# Altium PCB Burn Wire Dev Board.PcbDoc
Units mil, origin at the board's own origin, x right, y up, seen from the top; angles counter-clockwise.
Board outline 3031.5 x 787.4 mil, 2 copper layers (Top Layer, Bottom Layer), stack 52.559 mil thick; 26 components, 9 nets, 61 pads, 69 vias.
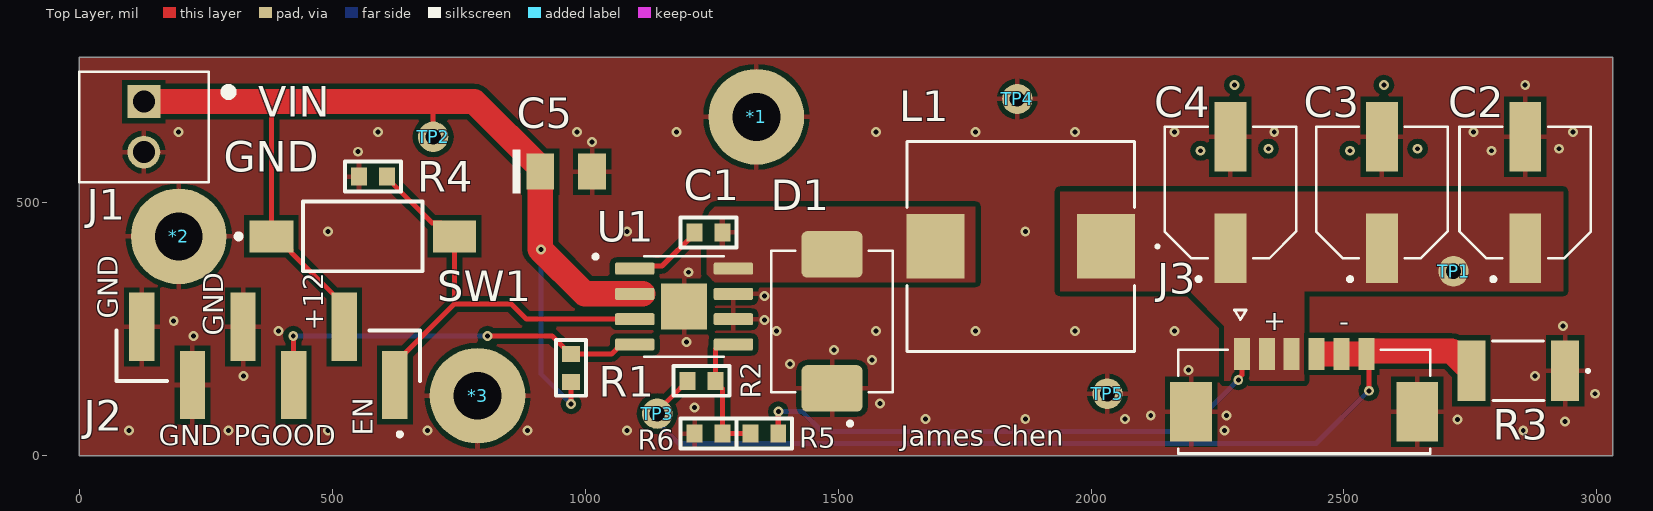
[diagram p0: Top Layer view]
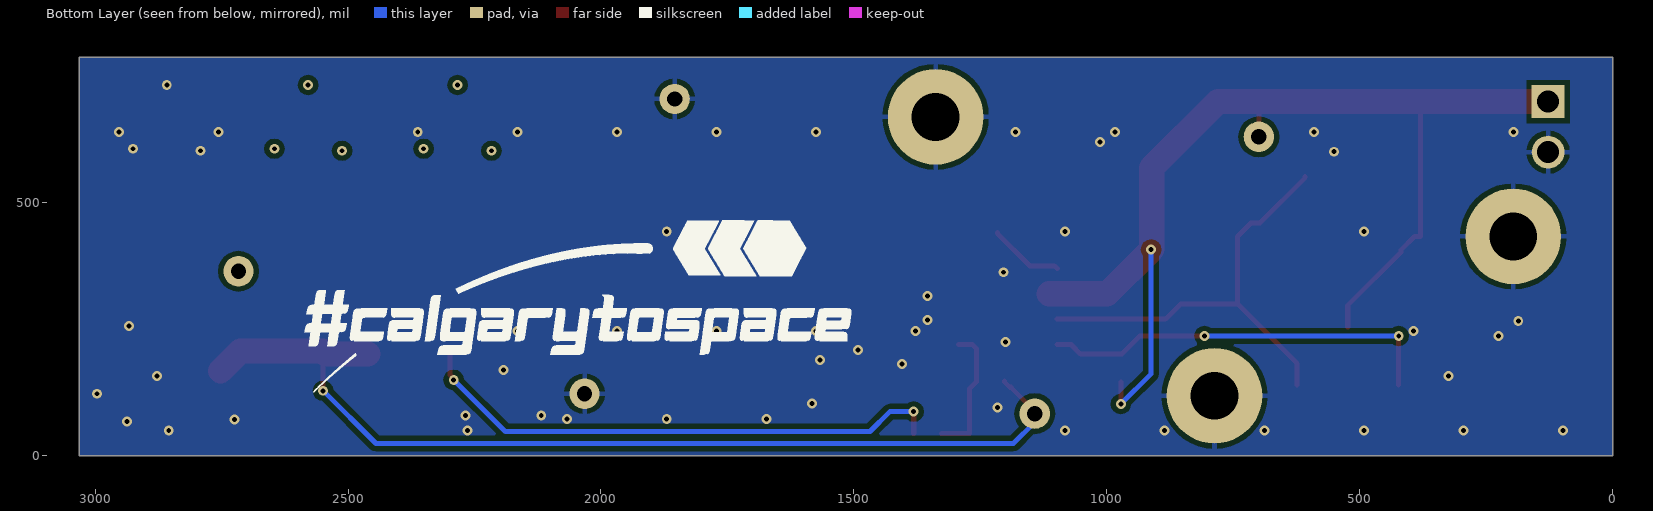
[diagram p1: Bottom Layer view, seen from below]
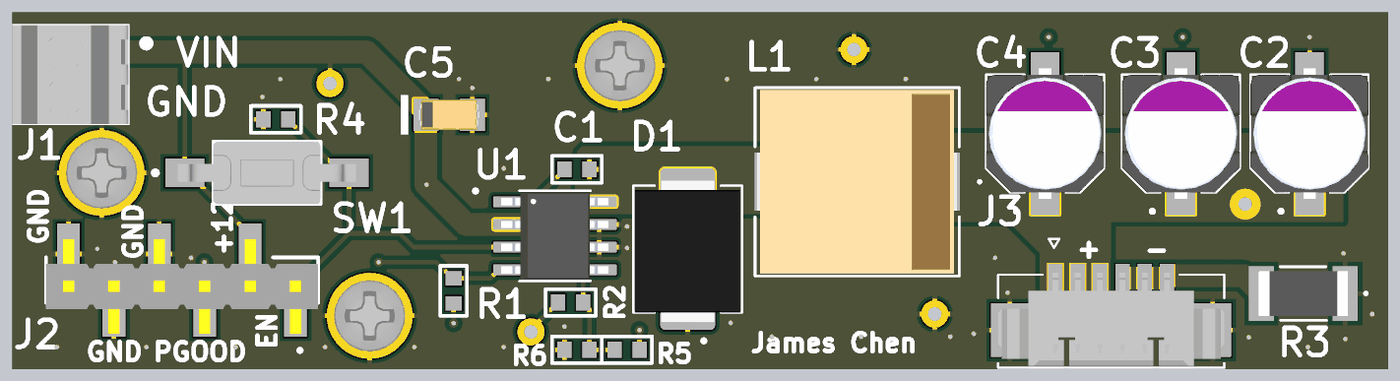
[diagram p2: 3D render of the assembled board from above, using the file's embedded part models]

## Layer stack, top to bottom
Top Solder: solder mask 0.4, Solder Resist, Dk 3.5
Top Layer: signal copper 1.378
Dielectric 1: dielectric 49.803, FR-4, Dk 4.1
Bottom Layer: signal copper 1.378
Bottom Solder: solder mask 0.4, Solder Resist, Dk 3.5

## Board outline
0,0 0,787.4 3031.5,787.4 3031.5,0

## Design rules (kind name [scope] priority, off if disabled: settings)
Clearance [All] p1: gap=10 ignorepadtopadclearanceinfootprint=FALSE except(0: Arc-Hole Track-Hole SMDPad-Hole THPad-Hole Via-Hole Fill-Hole Poly-Hole Region-Hole Text-Hole; 5: Arc-Arc Arc-Track Arc-SMDPad Track-Track Track-SMDPad SMDPad-SMDPad; 7.87: Arc-Text Track-Text SMDPad-Text THPad-Text Via-Text Fill-Text Poly-Text Region-Text Text-Text)
ComponentClearance [All] p1: gap=0 collisioncheckmode=3 verticalgap=10 showdistances=FALSE
DiffPairsRouting [All] p1: maxlimit=8 minlimit=8 mostfreqgap=8 toplayer_minwidth=3.5 toplayer_maxwidth=15 toplayer_prefwidth=4.8 bottomlayer_minwidth=3.5 bottomlayer_maxwidth=15 bottomlayer_prefwidth=4.8 maxuncoupledlength=500
HoleSize [All] p1: absolutevalues=TRUE maxlimit=248.03 minlimit=0.98 maxpercent=80.000 minpercent=20.000
MinimumSolderMaskSliver [All] p1: minsoldermaskwidth=1.5
PlaneConnect [All] p1: pad.planeconnectstyle=Relief pad.reliefexpansion=20 pad.reliefentries=4 pad.reliefconductorwidth=10 pad.reliefairgap=10 via.planeconnectstyle=Direct via.reliefexpansion=20 via.reliefentries=4 via.reliefconductorwidth=10 via.reliefairgap=10
PolygonConnect [All] p1: thpad.connectstyle=Relief thpad.reliefconductorwidth=10 thpad.reliefentries=4 thpad.polygonreliefangle="90 Angle" thpad.airgapwidth=10 smdpad.connectstyle=Relief smdpad.reliefconductorwidth=10 smdpad.reliefentries=4 smdpad.polygonreliefangle="90 Angle" smdpad.airgapwidth=10 via.connectstyle=Direct via.reliefconductorwidth=10 via.reliefentries=4 via.polygonreliefangle="90 Angle" via.airgapwidth=10
RoutingVias [All] p1: holewidth=9.84 width=19.68 viastyle="Through Hole" minholewidth=7.87 minwidth=15.75 maxholewidth=15.75 maxwidth=39.37
SilkToSilkClearance [All] p1 off: silktosilkclearance=0
SilkToSolderMaskClearance [IsPad] p1: minsilkscreentomaskgap=5.91 clearancetoexposedcopper=TRUE
SolderMaskExpansion SolderMaskExpansion_PAD [InPadClass('All Pads')] p1: expansion=2 istentingtop=FALSE
SolderMaskExpansion SolderMaskExpansion_VIA [IsVia] p2: expansion=4 istentingtop=TRUE
SolderMaskExpansion [All] p3: expansion=4 istentingtop=FALSE
Width [All] p1: maxlimit=50 minlimit=10 preferedwidth=10
23 further rules are at their usual default settings.

## Components (designator, comment, footprint, x,y, rotation, side; value= is the part's Value field where it differs from the comment)
*1 "M2 Mounting" "M2 Screws" 1338.58,669.29 r0 top
*2 "M2 Mounting" "M2 Screws" 196.85,433.07 r0 top
*3 "M2 Mounting" "M2 Screws" 787.4,118.11 r0 top
C1 "0.1uF" 0603 1244.09,440.94 r180 top
C2 "47 uF" CC-25SVPF47M 2858.27,519.69 r90 top
C3 "47 uF" CC-25SVPF47M 2574.8,519.69 r90 top
C4 "47 uF" CC-25SVPF47M 2275.59,519.69 r90 top
C5 "22uF" "CAP TANT 1206 (A) TCJ" 962.6,561.02 r0 top
D1 "B540C-13-F" D-B540C-13-F 1488.19,265.16 r90 top
J1 "282834-2" J-282834-2 127.95,649.61 r270 top
J2 "J-TSM-106-01-F-SV" J-TSM-106-01-F-SV 374.02,196.85 r0 top
J3 "J-0532610671" J-0532610671 2421.26,106.3 r0 top
L1 "6.8 UH" L-IHLP4040DZER6R8M01 1861.41,413.39 r180 top value="6.8 uH"
R1 "10K" 0603 972.44,173.23 r270 top
R2 "10K" 0603 1230.32,147.64 r180 top
R3 "0.5R" 2010 2844.49,167.32 r180 top
R4 "10K" 0603 580.71,551.18 r0 top
R5 "0R" 0603 1354.33,43.31 r0 top
R6 "0R" 0603 1244.09,43.31 r0 top
SW1 "FSMSM" TECO-FSMSM-2_V 561.02,433.07 r0 top
TP1 "TP" TP 2715.54,364.17 r90 top
TP2 "TP" TP 698.82,629.92 r90 top
TP3 "TP" TP 1141.73,82.68 r90 top
TP4 "TP" TP 1853.33,704.72 r90 top
TP5 "TP" TP 2031.5,122.05 r90 top
U1 "ADP2303ARDZ" U-ADP2303ARDZ 1195.65,294.42 r0 top

## Footprints (in the part's own frame and the unit in brackets; to place one, negate y for a bottom-side part, rotate by r counter-clockwise, add the part's x,y. Pads: shape width x height; smd on the part's side, far side on the other; paste and mask are expansions set on the pad)
0603 [mm]
  rect 0.8x0.9 smd: 1(-0.7,0) 2(0.7,0)
  silkscreen extent -1.4,-0.75 1.4,0.75, body extent -0.88,-0.48 0.87,0.47, height 1.3
2010 [mm]
  rect 1.4x3.05 smd paste+0 mask+0: 1(-2.35,0) 2(2.35,0)
  silkscreen extent -3.58,-1.5 1.3,1.5, body extent -2.5,-1.25 2.5,1.25, height 0.65
"CAP TANT 1206 (A) TCJ" [mm] "Cap Tant 2-Leads, EIA 1206, Metric 3216, Body 3.2x1.6mm"
  rect 1.4x1.8 smd: 1(-1.3,0) 2(1.3,0)
  silkscreen extent -2.7,-1.1 -2.3,1.1, body extent -1.7,-0.84 1.7,0.84, height 1.72
CC-25SVPF47M [mm]
  rect 3.5x1.6 smd: 1(-2.8,0) 2(2.8,0)
  silkscreen extent -4.45,-3.3 3.3,3.3, body extent -3.65,-3.3 3.65,3.3, height 5.9
D-B540C-13-F [mm]
  rrect25% 2.33x3.07 smd: A(3.365,0) C(-3.365,0)
  silkscreen extent -5.23,-3.05 3.55,3.05, body extent -4.1,-2.96 3.84,2.95, height 2.25
J-282834-2 [mm]
  rect 1.65x1.65 hole 1.1: 1(-1.27,0)
  round 1.65 hole 1.1: 2(1.27,0)
  silkscreen extent -2.77,-3.25 2.77,4.45, body extent -2.77,-3.25 2.77,3.25, height 10.03
J-0532610671 [mm]
  rect 0.8x1.6 smd mask+0: 1(-3.125,2.4) 2(-1.875,2.4) 3(-0.625,2.4) 4(0.625,2.4) 5(1.875,2.4) 6(3.125,2.4)
  rect 2.1x3 smd mask+0: S1(-5.675,-0.5) S2(5.675,-0.5)
  silkscreen extent -6.32,-2.6 6.32,4.6, body extent -6.32,-2.5 6.32,2.7, height 3.38
J-TSM-106-01-F-SV [mm]
  rect 1.27x3.43 smd: 01(6.35,-1.46) 02(3.81,1.46) 03(1.27,-1.46) 04(-1.27,1.46) 05(-3.81,-1.46) 06(-6.35,1.46)
  silkscreen extent -7.62,-4.03 7.62,1.27, body extent -7.62,-3 7.62,2.29, height 9.68
L-IHLP4040DZER6R8M01 [mil]
  rect 115x128 smd paste+0 mask+0: 1(-168.5,0) 2(168.5,0)
  silkscreen extent -273,-208 225,208, body extent -220,-202 220,202, height 160
"M2 Screws" [mm]
  round 4.8 hole 2.4: 1(0,0)
  body extent -2,-2 2,2, height 1.71
TECO-FSMSM-2_V [mm] "SMD, 2-Leads, Body 6x3.5mm, Pitch 9.19mm"
  rect 2.2x1.6 smd: 1(-4.595,0)
  rect 2.18x1.6 smd: 2(4.595,0)
  silkscreen extent -6.37,-1.75 3,1.75, body extent -4.98,-1.75 4.98,1.75, height 4.4
TP [mil]
  round 60 hole 30: 1(0,-1)
U-ADP2303ARDZ [mm]
  rrect25% 1.97x0.6 smd: 1(-2.475,1.905) 2(-2.475,0.635) 3(-2.475,-0.635) 4(-2.475,-1.905) 5(2.475,-1.905) 6(2.475,-0.635) 7(2.475,0.635) 8(2.475,1.905)
  rect 2.29x2.29 smd paste-2: 9(0,0)
  silkscreen extent -4.54,-2.52 2,2.6, body extent -3,-2.45 3,2.45, height 1.75

## Part data
C1: library part CC-104-K-25V-X7R-0603, "0.1 µF ±10% 25V Ceramic Capacitor X7R 0603 (1608 Metric)", Manufacturer="Samsung Electro-Mechanics", Manufacturer Part #=CL10B104KA8NNNC, ComponentLink1description=Datasheet, ComponentLink1URL=https://ds.yuden.co.jp/TYCOMPAS/ut/detail?pn=TMK105BJ104KV-F%20%20&u=M, ComponentLink2description="Manufacturer Website", ComponentLink2URL=https://www.yuden.co.jp/or/, Distributor=Digikey, Distributor Part #=1276-1006-1-ND, Part Description="0.1 µF ±10% 25V Ceramic Capacitor X7R 0603 (1608 Metric)"
C2 C3 C4: library part CC-25SVPF47M, "CAP ALUM POLY 47UF 20% 25V SMD", Manufacturer="Panasonic Electronic Components", Manufacturer Part #=25SVPF47M, ComponentLink1description=Datasheet, ComponentLink2description="Manufacture Website", Distributor=Digikey, Distributor Part #=P16513CT-ND, Part Description="CAP ALUM POLY 47UF 20% 25V SMD"
C5: library part CT-225-M-20V-OTH-1206, "CAP TANT 22UF 10% 10V 1206", Manufacturer="KYOCERA AVX", Manufacturer Part #=TPSA226K010T0900, ComponentLink1description=Datasheet, ComponentLink2description="Manufacturer Website", Distributor=Digikey, Distributor Part #=478-11193-1-ND, Part Description="CAP TANT 22UF 10% 10V 1206"
D1: library part D-B540C-13-F, "DIODE SCHOTTKY 40V 5A SMC", Manufacturer="Diodes Incorporated", Distributor=Digikey, Distributor Part #=B540C-FDICT-ND, Manufacturer Part #=B540C-13-F
J1: library part J-282834-2, "TERM BLK 2P SIDE ENT 2.54MM PCB", Manufacturer="TE Connectivity AMP Connectors", Distributor=Digikey, Distributor Part #=A98333-ND, Manufacturer Part #=282834-2
J2: "CONN HEADER SMD 6POS 2.54MM", Manufacturer="Samtec Inc.", Manufacturer Part #=TSM-106-01-F-SV, Distrbutor part #=SAM12239-ND, Distributor=Digikey
J3: "CONN HEADER SMD R/A 6POS 1.25MM", Distributor=Digi-Key, Distributor Part #=WM7624CT-ND, Manfacturer=Molex, Manfacturer Part #=0532610671
L1: library part L-IHLP4040DZER6R8M01, "FIXED IND 6.8UH 8A 23.3 MOHM SMD", Manufacturer="Vishay Dale", Manufacturer Part #=IHLP4040DZER6R8M01, Distributor=Digikey, Distributor Part #=541-1303-1-ND
R1 R2 R4: library part RT-10K0-F-1/16W-0603, "RES 10K OHM 1% 1/8W 0603", Manufacturer="Stackpole Electronics Inc", Manufacturer Part #=RNCP0603FTD10K0, ComponentLink1description=Datasheet, ComponentLink1URL=https://www.vishay.com/docs/20035/dcrcwe3.pdf, ComponentLink2description="Manufacturer Website", ComponentLink2URL=https://www.vishay.com/, Distributor=Digikey, Distributor Part #=RNCP0603FTD10K0CT-ND, Part Description="RES 10K OHM 1% 1/8W 0603"
R3: library part RT-0.5R0-F-1W-2010, "RES 0.5 OHM 1% 1W 2010", Manufacturer="Vishay Dale", Manufacturer Part #=WSLT2010R5000FEA18, ComponentLink1description=Datasheet, ComponentLink1URL=https://www.vishay.com/docs/20035/dcrcwe3.pdf, ComponentLink2description="Manufacturer Website", ComponentLink2URL=https://www.vishay.com/, Distributor=Digikey, Distributor Part #=541-10112-1-ND, Part Description="RES 0.5 OHM 1% 1W 2010"
R5 R6: library part RT-0R00-F-1/10W-0603, "0 Ohms Jumper 0.1W, 1/10W Chip Resistor 0603 (1608 Metric) Automotive AEC-Q200 Thick Film", Manufacturer="Stackpole Electronics Inc", Manufacturer Part #=RMCF0603ZT0R00, ComponentLink1description=Datasheet, ComponentLink1URL=https://industrial.panasonic.com/ww/products/resistors/chip-resistors/general-purpose-chip-resistors/models/ERJ2GE0R00X, ComponentLink2description="Manufacturer Website", ComponentLink2URL=https://industrial.panasonic.com/ww/products/resistors/chip-resistors/general-purpose-chip-resistors/models/ERJ2GE0R00X, Distributor=Digikey, Distributor Part #=RMCF0603ZT0R00CT-ND, Part Description="0 Ohms Jumper 0.1W, 1/10W Chip Resistor 0603 (1608 Metric) Automotive AEC-Q200 Thick Film"
SW1: library part CMP-2000-07511-1, "FSMSM Push Button Switch, 50 mA, -35 to 85 degC, 2-Pin SMD, RoHS, Bulk", Case\/Package=SMD/SMT, Contact Current Rating=50mA, Contact Resistance=100mOhm, Manufacturer="TE Connectivity", Max Operating Temperature=85degC, Max Voltage Rating (DC)=12V, Min Operating Temperature=-35degC, Operating Force=180gf, Package Description="2-Pin Surface Mount Device, Body 6 x 3.5 mm, Pitch 9.19 mm", Package Quantity=1000, Voltage Rating (DC)=24V, Actuator Length=1.07mm, Actuator Material=Polyamide, Contact Material=Brass, Contact Plating=Silver, Current Rating=50mA, Datasheet URL=http://www.te.com/commerce/DocumentDelivery/DDEController?Action=showdoc&DocId=Customer+Drawing%7F1437566-3%7FC2%7Fpdf%7FEnglish%7FENG_CD_1437566-3_C2_1437566_3_1_c.dwg.pdf%7F1437566-3, Datasheet Version="Rev. C2, 08/2014", Electrical Life=20000Cycles, ELV=Compliant, Illumination Type=Illuminated, Lead Free=LeadFree, Manufacturer URL=http://www.te.com/, Mechanical Life=20000Cycles, Mount=SurfaceMount, Mounting Technology=SurfaceMount, Orientation=Straight, Package Reference=FSMSM, Packaging=LoosePiece, REACH SVHC=Unknown, RoHSCompliant=true, Switch Travel=0.25mm, Termination=GullWing, Throw Configuration=SPST
TP1 TP2 TP3 TP4 TP5: "Test Point", ComponentLink1description=Datasheet, ComponentLink1URL=https://industrial.panasonic.com/ww/products/resistors/chip-resistors/general-purpose-chip-resistors/models/ERJ2GE0R00X, ComponentLink2description="Manufacturer Website", ComponentLink2URL=https://industrial.panasonic.com/ww/products/resistors/chip-resistors/general-purpose-chip-resistors/models/ERJ2GE0R00X
U1: library part U-ADP2303ARDZ, "IC REG BUCK ADJUSTABLE 3A 8SOIC", Manufacturer="Analog Devices Inc.", Distributor=Digikey, Distributor Part #=505-ADP2303ARDZ-ND, Manufacturer Part #=ADP2303ARDZ

## Via types
v1: diameter 19.68, hole 9.84, Top Layer to Bottom Layer, tented both sides, 69 vias

## Nets (pads, with @x,y where several pads share a name; then routed paths per layer and width w, separated by ;. In a path a pad name is that pad's centre, name@x,y a point inside that pad or via, vN(x,y) a via of type N, cw(c..) or ccw(c..) an arc to the next point about the centre after c; other vN are vias at no path point)
+12: C5.1 J1.1 J2.02 R1.2 SW1.1 TP2.1 U1.2 | length 2193.9
  Top Layer w10: 377.95,699.61 380.12,697.44 SW1.1 391.93,433.07 418.43,406.57 418.43,402.44 524.02,296.85 J2.02 ; 698.82,699.61 699.82,698.61 TP2.1 ; v1(972.44,101.79) R1.2
  Top Layer w50: J1.1 377.95,699.61 698.82,699.61 780.71,699.61 911.42,568.9 C5.1 v1@911.42,407.48 ; v1@912.22,406.68 999.48,319.42 U1.2 U1.2@1114.17,319.42
  Bottom Layer w10: v1(912.61,407.08) 912.61,161.62 v1(972.44,101.79)
BURN_NEG: J3.4 J3.5 J3.6 R2.2 R3.2 TP3.1 | length 1959.9
  Top Layer w10: TP3.1 1142.73,87.61 1190.04,134.92 1192.01,134.92 1202.76,145.67 R2.2 ; J3.6 2549.21,195.87 v1(2549.21,127.95)
  Top Layer w50: J3.4@2460.63,200.79 J3.5 J3.6 2550.2,206.69 2712.6,206.69 R3.2
  Bottom Layer w10: TP3.1 1142.73,65.93 1185.04,23.62 2444.88,23.62 v1(2549.21,127.95)
BURN_POS: C2.1 C3.1 C4.1 J3.1 J3.2 J3.3 L1.1 R5.2 TP1.1 | length 1065.5
  Top Layer w10: R5.2 v1(1381.89,86.61) ; v1(2291.08,149.35) 2291.08,151.97 2298.23,159.12 J3.1
  Bottom Layer w10: v1(1381.89,86.61) 1429.13,86.61 1468.5,47.24 2188.98,47.24 v1(2291.08,149.35)
ENABLE: J2.01 R4.2 SW1.2 U1.3 | length 895.1
  Top Layer w10: R4.2 608.27,549.21 697.91,459.57 715.43,459.57 SW1.2 741.93,299.8 ; J2.01 624.02,181.89 741.93,299.8 ; U1.3 884.13,269.42 853.74,299.8 741.93,299.8
GND: *1.1 *2.1 *3.1 C2.2 C3.2 C4.2 C5.2 D1.C J1.2 J2.04 J2.05 J2.06 J3.S1 J3.S2 R3.1 R4.1 R6.1 TP4.1 TP5.1 U1.6 U1.7 U1.9
  other v1: 98.43,49.21 295.28,49.21 492.13,49.21 688.98,49.21 885.83,49.21 1082.68,49.21 2263.78,49.21 2854.33,49.21 2937.01,66.93 2724.41,70.87 1673.23,72.09 1870.08,72.09 2066.93,72.09 2118.11,78.74 2267.72,78.74 1216.54,94.49 1582.68,102.36 2996.06,122.05 324.8,157.48 2877.95,157.48 2192.91,169.29 1405.51,181.1 1566.93,188.98 1492.13,208.66 1200.79,224.41 226.38,236.22 393.7,246.06 1377.95,246.06 1574.8,246.06 1771.65,246.06 1968.5,246.06 2165.35,246.06 2933.07,255.91 187.01,265.75 1354.33,267.72 1354.33,314.96 1204.72,362.2 492.13,442.91 1082.68,442.91 1870.08,442.91 551.18,600.39 2791.34,602.36 2925.2,606.3 1013.78,620.08 196.85,639.76 590.55,639.76 984.25,639.76 1181.1,639.76 1574.8,639.76 1771.65,639.76 1968.5,639.76 2165.35,639.76 2362.2,639.76 2755.91,639.76 2952.76,639.76 2858.27,732.28
NetC1_1: C1.1 D1.A L1.2 U1.8
NetC1_2: C1.2 U1.1 | length 149.1
  Top Layer w10: U1.1 1103.23,374.43 1151.99,374.43 1216.54,438.98 C1.2
NetR2_1: R2.1 R5.1 R6.2 U1.5 | length 267.3
  Top Layer w10: U1.5 1266.13,219.42 1257.87,211.17 R2.1 1257.87,145.67 1271.65,131.89 R6.2 R5.1
PGOOD: J2.03 R1.1 U1.4 | length 794.6
  Top Layer w10: v1(423.23,236.22) 424.02,235.43 J2.03 ; v1(807.09,236.22) 935.04,236.22 970.47,200.79 R1.1 1052.61,200.79 1071.24,219.42 U1.4
  Bottom Layer w10: v1(423.23,236.22) v1(807.09,236.22)
copper on no net:
  other v1: 2216.54,602.36 2511.81,602.36 2350.39,606.3 2645.67,606.3 2283.46,732.28 2578.74,732.28

## Polygon pours and split planes (outlines as drawn)
GND on Top Layer "GND_L01_P003" (solid, pour order 3): 0,0 0,787.4 3031.5,787.4 3031.5,0
BURN_POS on Top Layer "NONET_L-01_P-001" (solid, pour order 2): 2421.26,147.64 2263.78,147.64 2263.78,255.91 2194.88,324.8 1938.98,324.8 1938.98,521.65 2933.07,521.65 2933.07,324.8 2431.1,324.8 2421.26,324.8
NetC1_1 on Top Layer "NONET_L-01_P-001" (solid, pour order 0): 1244.09,476.38 1240.16,472.44 1240.16,358.27 1255.91,342.52 1771.65,342.52 1771.65,492.13 1255.91,492.13 1240.16,476.38
GND on Bottom Layer "GND_L02_P004" (solid, pour order 4): 0,0 0,787.4 3031.5,787.4 3031.5,0

## Silkscreen, mask and mechanical layers (free items; w line width, h text height)
Top Overlay:
  text "VIN" at 354.49,669.45 h60
  text "GND" at 285.59,561.18 h60
  text "GND" at 76.61,269.84 h40 r90
  text "+" at 2340.71,247.43 h40
  text "+12" at 482.13,246.22 h40 r90
  text "-" at 2490.31,245.91 h40
  text "GND" at 285.28,236.38 h40 r90
  text "EN" at 580.55,39.53 h40 r90
  text "GND" at 157.64,19.84 h40
  text "PGOOD" at 305.28,19.84 h40
  text "James Chen" at 1624.02,19.69 h40
Bottom Overlay:
  drawing of 20 lines, arcs and shapes, not listed
Mechanical 1:
  the board outline again, w10